# EAGLE board Pico2 W5_V1.0_20240830(1) (EAGLE 9.6.2)
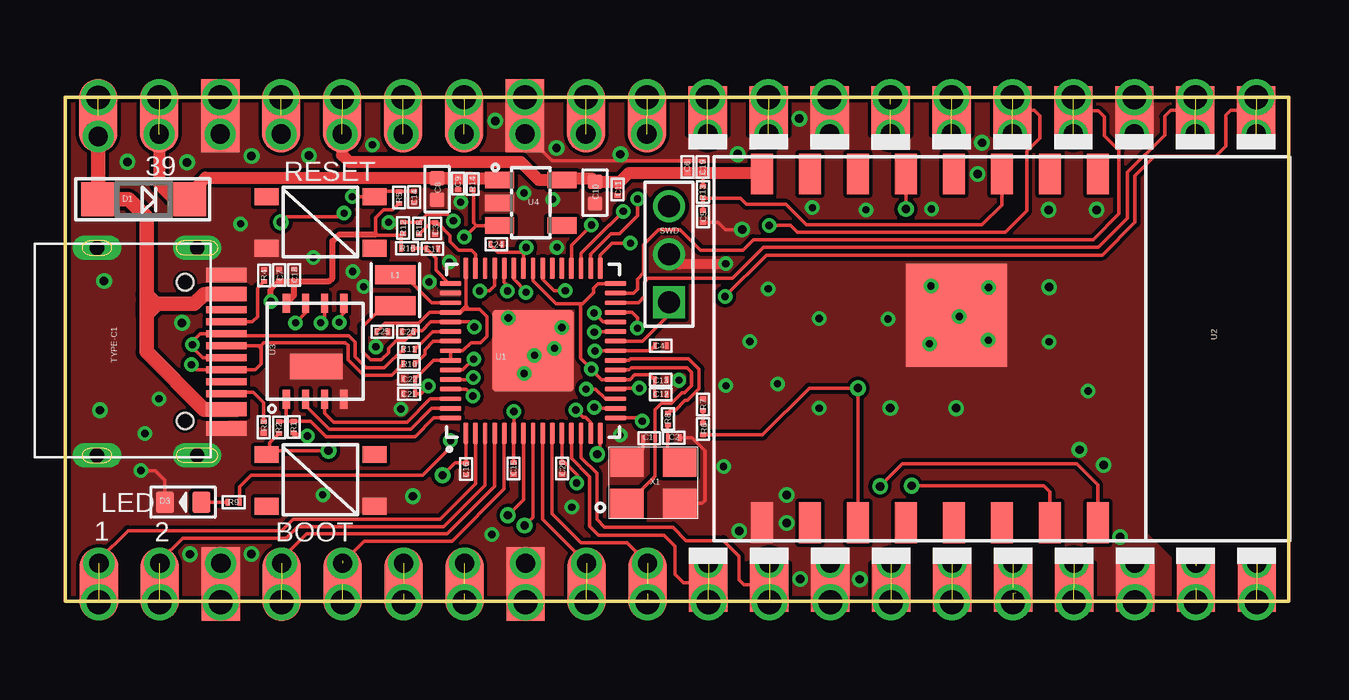
[diagram p0: board, top side]
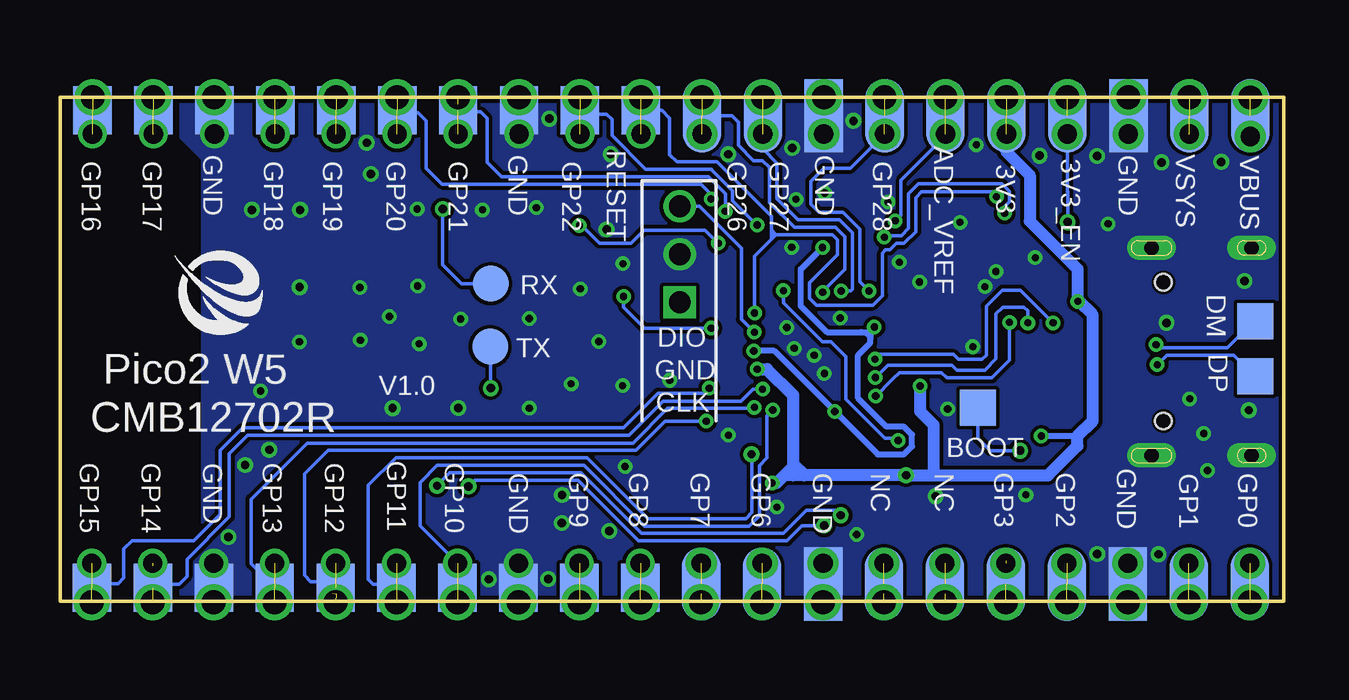
[diagram p1: board, bottom side, seen from below]

Size 51 x 21 mm. Coordinates in mm from the lower left corner, seen from the top.
Copper layers (1*16): Top 0.035mm / dielectric 1.5mm / Bottom 0.035mm
Design rules "default1 *": minimum track width 6mil, minimum drill 0.3mm, track to track 6mil, track to pad 4mil, pad to pad 4mil, via to via 6mil, smd to smd 6mil, copper to edge 6mil, drill to drill 4mil, minimum pad ring 6mil, minimum via ring 6mil, stop-mask expansion 4mil, vias tented up to drill 100mil, thermal gap 10mil
Net classes: 0 default: width 0.102 mm, drill 0.254 mm, clearance 0.102 mm; 1 PWR: width 0.254 mm; 2 GND: width 0.203 mm; 3 RS485: width 0.203 mm, clearance 0.203 mm; 4 USB: width 0.152 mm, clearance 0.152 mm; 5 ANT: width 0.889 mm, clearance 0.203 mm; 6 DVI-D0: width 0.203 mm, clearance 0.203 mm to class 0, clearance 0.203 mm
tRestrict: 6 lines
bRestrict: 6 lines

## Footprints (pad centres in the part's own frame; a part is rotated, then mirrored left to right if it is on the bottom)
SMD_KEY4.2*3.*.2.5 = smd 1 x 0.7: P$1 -2.184,0.102; P$2 2.316,0.102; P$3 -2.184,-2.048; P$4 2.316,-2.048
0201_W = smd 0.2 x 0.3: 1 -0.25,0; 2 0.25,0
0402 = smd 0.6 x 0.6: 1 -0.45,0; 2 0.45,0
SOD123 = smd 1.4 x 1.4: A 1.9,0; C -1.9,0
DISCRETE_D0603 = smd 0.762 x 0.889: + -0.762,0; - 0.762,0
SMD,1.6X2MM = smd 0.8 x 1.7: P$1 -0.65,0; P$2 0.65,0
CROWPICO_W_PAD-1P = smd 1.5 x 1.5: P$1 0,0
CROWPICO-W = smd 3.048 x 1.6: 1-1 -10.185,26.289; 2-1 -10.185,23.749; 3-1 -10.185,21.209; 4-1 -10.195,18.669; 5-1 -10.185,16.129; 6-1 -10.185,13.589; 7-1 -10.185,11.049; 8-1 -10.185,8.509; 9-1 -10.185,5.969; 10-1 -10.185,3.429; 31-1 9.322,3.454; 32-1 9.322,5.994; 33-1 9.322,8.534; 34-1 9.322,11.074; 35-1 9.322,13.614; 36-1 9.322,16.154; 37-1 9.322,18.694; 38-1 9.322,21.234; 39-1 9.322,23.774; 40-1 9.322,26.314 | smd 3.048 x 1.6 bottom: 1-2 -10.185,26.289; 2-2 -10.185,23.749; 3-2 -10.185,21.209; 4-2 -10.195,18.669; 5-2 -10.185,16.129; 6-2 -10.185,13.589; 7-2 -10.185,11.049; 8-2 -10.185,8.509; 9-2 -10.185,5.969; 10-2 -10.185,3.429; 31-2 9.322,3.454; 32-2 9.322,5.994; 33-2 9.322,8.534; 34-2 9.322,11.074; 35-2 9.322,13.614; 36-2 9.322,16.154; 37-2 9.322,18.694; 38-2 9.322,21.234; 39-2 9.322,23.774; 40-2 9.322,26.314 | drill 0.8 pad 1.295: 1-3 -9.322,26.289; 2-3 -9.322,23.749; 3-3 -9.322,21.209; 4-3 -9.322,18.669; 5-3 -9.322,16.129; 6-3 -9.322,13.589; 7-3 -9.322,11.049; 8-3 -9.322,8.509; 9-3 -9.322,5.969; 10-3 -9.322,3.429; 31-3 8.56,3.454; 32-3 8.56,5.994; 33-3 8.56,8.534; 34-3 8.56,11.074; 35-3 8.56,13.614; 36-3 8.56,16.154; 37-3 8.56,18.694; 38-3 8.56,21.234; 39-3 8.56,23.774; 40-3 8.458,26.314 | drill 1 pad 1.295: 1-4 -10.947,26.289; 2-4 -10.947,23.749; 3-4 -10.947,21.209; 4-4 -10.947,18.669; 5-4 -10.947,16.129; 6-4 -10.947,13.589; 7-4 -10.947,11.049; 8-4 -10.947,8.509; 9-4 -10.947,5.969; 10-4 -10.947,3.429; 11-4 -10.947,0.889; 12-4 -10.947,-1.651; 13-4 -10.947,-4.191; 14-4 -10.947,-6.731; 15-4 -10.947,-9.271; 16-4 -10.947,-11.811; 17-4 -10.947,-14.351; 18-4 -10.947,-16.891; 19-4 -10.947,-19.431; 20-4 -10.947,-21.971; 21-4 10.084,-21.946; 22-4 10.084,-19.406; 23-4 10.084,-16.866; 24-4 10.084,-14.326; 25-4 10.084,-11.786; 26-4 10.084,-9.246; 27-4 10.084,-6.706; 28-4 10.084,-4.166; 29-4 10.084,-1.626; 31-4 10.084,3.454; 32-4 10.084,5.994; 33-4 10.084,8.534; 34-4 10.084,11.074; 35-4 10.084,13.614; 36-4 10.084,16.154; 37-4 10.084,18.694; 38-4 10.084,21.234; 39-4 10.084,23.774 | smd 2.007 x 1.6: 11-1 -10.338,0.889; 12-1 -10.338,-1.651; 13-1 -10.338,-4.191; 14-1 -10.338,-6.731; 15-1 -10.338,-9.271; 16-1 -10.338,-11.811; 17-1 -10.338,-14.351; 18-1 -10.338,-16.891; 19-1 -10.338,-19.431; 20-1 -10.338,-21.971; 21-1 9.55,-21.946; 22-1 9.55,-19.406; 23-1 9.55,-16.866; 24-1 9.55,-14.326; 25-1 9.55,-11.786; 26-1 9.55,-9.246; 27-1 9.55,-6.706; 28-1 9.55,-4.166; 29-1 9.55,-1.626; 30-1 9.55,0.914 | smd 2.007 x 1.6 bottom: 11-2 -10.338,0.889; 12-2 -10.338,-1.651; 13-2 -10.338,-4.191; 14-2 -10.338,-6.731; 15-2 -10.338,-9.271; 16-2 -10.338,-11.811; 17-2 -10.338,-14.351; 18-2 -10.338,-16.891; 19-2 -10.338,-19.431; 20-2 -10.338,-21.971; 21-2 9.55,-21.946; 22-2 9.55,-19.406; 23-2 9.55,-16.866; 24-2 9.55,-14.326; 25-2 9.55,-11.786; 26-2 9.55,-9.246; 27-2 9.55,-6.706; 28-2 9.55,-4.166; 29-2 9.55,-1.626; 30-2 9.55,0.914 | drill 0.8 pad 0.813: 11-3 -9.322,0.889; 12-3 -9.322,-1.651; 13-3 -9.322,-4.191; 14-3 -9.322,-6.731; 15-3 -9.322,-9.271; 16-3 -9.322,-11.811; 17-3 -9.322,-14.351; 18-3 -9.322,-16.891; 19-3 -9.322,-19.431; 20-3 -9.322,-21.971; 21-3 8.56,-21.946; 22-3 8.56,-19.406; 23-3 8.56,-16.866; 24-3 8.56,-14.326; 25-3 8.56,-11.786; 26-3 8.56,-9.246; 27-3 8.56,-6.706; 28-3 8.56,-4.166; 29-3 8.56,-1.626; 30-3 8.56,0.914 | drill 1 pad 1.499: 30-4 10.084,0.914 | drill 0.991 pad 1.295: 40-4 10.084,26.314
TP2 = smd 1.5 x 1.5: P$1 0,0
HDR2.0-3P = drill 0.9 square: P$1 0,0 | drill 0.9: P$2 2,0; P$3 4,0
TYPE-C16PIN2MD(073) = smd 0.3 x 1.7: A1 -3.35,4.31; A4 -2.55,4.31; A5 -1.25,4.31; A6 -0.25,4.31; A7 0.25,4.31; A8 1.25,4.31; A9 2.55,4.31; A12 3.35,4.31; B1 3.05,4.31; B4 2.25,4.31; B5 1.75,4.31; B6 0.75,4.31; B7 -0.75,4.31; B8 -1.75,4.31; B9 -2.25,4.31; B12 -3.05,4.31 | drill 0.6 pad 1.016 long: P$1 -4.325,3.09; P$2 4.325,3.09; P$3 -4.325,-1.09; P$4 4.325,-1.09 | hole 0.68: -2.89,2.59; 2.89,2.59
QFN-60_7X7MM = smd 0.875 x 0.2: P$1 -3.437,2.8; P$2 -3.437,2.4; P$3 -3.437,2; P$4 -3.437,1.6; P$5 -3.437,1.2; P$6 -3.437,0.8; P$7 -3.437,0.4; P$8 -3.437,0; P$9 -3.437,-0.4; P$10 -3.437,-0.8; P$11 -3.437,-1.2; P$12 -3.437,-1.6; P$13 -3.437,-2; P$14 -3.437,-2.4; P$15 -3.437,-2.8; P$31 3.437,-2.8; P$32 3.437,-2.4; P$33 3.437,-2; P$34 3.437,-1.6; P$35 3.437,-1.2; P$36 3.437,-0.8; P$37 3.437,-0.4; P$38 3.437,0; P$39 3.437,0.4; P$40 3.437,0.8; P$41 3.437,1.2; P$42 3.437,1.6; P$43 3.437,2; P$44 3.437,2.4; P$45 3.437,2.8 | smd 0.2 x 0.875: P$16 -2.8,-3.437; P$17 -2.4,-3.437; P$18 -2,-3.437; P$19 -1.6,-3.437; P$20 -1.2,-3.437; P$21 -0.8,-3.437; P$22 -0.4,-3.437; P$23 0,-3.437; P$24 0.4,-3.437; P$25 0.8,-3.437; P$26 1.2,-3.437; P$27 1.6,-3.437; P$28 2,-3.437; P$29 2.4,-3.437; P$30 2.8,-3.437; P$46 2.8,3.437; P$47 2.4,3.437; P$48 2,3.437; P$49 1.6,3.437; P$50 1.2,3.437; P$51 0.8,3.437; P$52 0.4,3.437; P$53 0,3.437; P$54 -0.4,3.437; P$55 -0.8,3.437; P$56 -1.2,3.437; P$57 -1.6,3.437; P$58 -2,3.437; P$59 -2.4,3.437; P$60 -2.8,3.437 | smd 3.4 x 3.4: P$61 0,0
BW16 = smd 1.7 x 0.9: 1 -6.9,5.84; 2 -6.9,3.84; 3 -6.9,1.84; 4 -6.9,-0.16; 5 -6.9,-2.16; 6 -6.9,-4.16; 7 -6.9,-6.16; 8 -6.9,-8.16; 9 7.626,-8.16; 10 7.626,-6.16; 11 7.626,-4.16; 12 7.626,-2.16; 13 7.626,-0.16; 14 7.626,1.84; 15 7.626,3.84; 16 7.626,5.84 | smd 4.3 x 4.2: 17 -1.02,-0.06
W25QXX-XSON-8-EP(4X4) = smd 0.8 x 0.3: 1 -2,1.2; 2 -2,0.4; 3 -2,-0.4; 4 -2,-1.2; 5 2,-1.2; 6 2,-0.4; 7 2,0.4; 8 2,1.2 | smd 1.067 x 2.184: EP -0.646,-0.051
SOT23-5_W = smd 0.69 x 1.2: 1 -0.95,-1.3; 2 0,-1.3; 3 0.95,-1.3; 4 0.95,1.3; 5 -0.95,1.3
A_XBJ_SMD3225 = smd 1.4 x 1.2: 1 -1.1,-0.85; 2 1.1,-0.85; 3 1.1,0.85; 4 -1.1,0.85

## Placement (x,y rotation side)
BOOT  TS3425BA  [SMD_KEY4.2*3.*.2.5]  10.58,6 0 top
C1  15pF  [0201_W]  24.34,6.79 180 top
C2  15pF  [0201_W]  25.36,6.8 180 top
C3  225  [0201_W]  15.43,15.52 270 top
C4  475  [0201_W]  24.83,10.64 0 top
C5  104  [0201_W]  26.59,16.03 90 top
C6  104  [0201_W]  25.95,18.09 270 top
C7  104  [0201_W]  8.92,13.58 90 top
C8  10uf  [0402]  15.5,17.17 90 top
C9  104  [0201_W]  16.38,17.39 90 top
C10  10uf  [0402]  22.08,17.02 90 top
C11  104  [0201_W]  23.03,17.16 90 top
C12  104  [0201_W]  24.83,8.61 0 top
C13  104  [0201_W]  24.83,9.22 0 top
C14  104  [0201_W]  14.55,16.83 90 top
C15  104  [0201_W]  18.68,5.52 270 top
C16  104  [0201_W]  16.71,5.51 270 top
C17  475  [0201_W]  15.31,14.69 0 top
C18  225  [0201_W]  9.54,13.58 90 top
C19  105  [0201_W]  26.58,18.09 270 top
C20  104  [0201_W]  20.71,5.52 270 top
C21  104  [0201_W]  14.34,8.65 180 top
C22  104  [0201_W]  14.34,9.26 180 top
C24  104  [0201_W]  17.98,14.86 0 top
C25  475  [0201_W]  13.23,11.23 0 top
C26  475  [0201_W]  14.29,11.22 180 top
D1  MBR120LSF  [SOD123]  3.28,16.74 180 top
D3  MHT192UGCT绿色  [DISCRETE_D0603]  4.92,4.12 180 top
L1  3.3uH  [SMD,1.6X2MM]  13.77,12.95 90 top
P1  TP  [CROWPICO_W_PAD-1P]  1.19,9.36 270 bottom
P2  TP  [CROWPICO_W_PAD-1P]  1.19,11.67 270 bottom
P3  TP  [CROWPICO_W_PAD-1P]  12.74,8.06 270 bottom
PICO-W  CROWPICO-W  [CROWPICO-W]  27.7,10.9 90 top
R1  10K  [0201_W]  9.53,7.25 270 top
R2  1K  [0201_W]  8.91,7.24 270 top
R3  5.1K  [0201_W]  8.28,7.24 270 top
R4  5.1K  [0201_W]  8.3,13.57 270 top
R5  10K  [0201_W]  13.91,16.82 270 top
R6  0R/NC  [0201_W]  26.6,7.18 270 top
R7  1K  [0201_W]  26.59,8.2 270 top
R8  1K  [0201_W]  25.13,7.59 90 top
R9  680R  [0201_W]  7.03,4.12 0 top
R10  27.4R  [0201_W]  14.33,9.88 0 top
R11  27.4R  [0201_W]  14.33,10.5 0 top
R12  200R  [0201_W]  14.09,15.54 270 top
R13  10K  [0201_W]  26.59,17.04 90 top
R14  100K  [0201_W]  16.99,17.38 90 top
R15  1R  [0201_W]  14.75,15.53 90 top
R16  33R  [0201_W]  14.26,14.7 180 top
RESET  TS3425BA  [SMD_KEY4.2*3.*.2.5]  10.58,16.75 0 top
RX  TP  [TP2]  33.05,13.23 0 bottom
SWD  PIND2.0-3P  [HDR2.0-3P]  25.17,12.45 90 top
TX  TP  [TP2]  33.07,10.6 0 bottom
TYPE-C1  TYPE-C16PIN  [TYPE-C16PIN2MD(073)]  2.42,10.39 270 top
U1  RP2350A  [QFN-60_7X7MM]  19.51,10.43 90 top
U2  BW16(4M)板载天线  [BW16]  37.21,10.89 270 top
U3  W25Q64JVXGIQ  [W25QXX-XSON-8-EP(4X4)]  10.42,10.41 90 top
U4  RT9013_33GB  [SOT23-5_W]  19.41,16.6 270 top
X1  X322512MSB4SI  [A_XBJ_SMD3225]  24.51,4.92 0 top

## Library data of the parts
BOOT PICO-W RESET RX SWD TX TYPE-C1 U2 U3 = CKP
C1-C7 C9 C11-C22 C24-C26 R1-R16 U4 = WGH
C8 C10 = A_xbj
D1 = diode
D3 = Crowtail_SIM1606
L1 = CrowPanel_Advance_HMI
P1-P3 = ESP32- 3.5 TFT Display(RGB)-V2.0
U1 = RP2350
X1 = CrowBot_V1.4

## Nets
3V3_EN: PICO-W.37-1 PICO-W.37-2 PICO-W.37-3 PICO-W.37-4 R14.1 U4.3
+1V1: C4.1 C15.1 C24.1 C26.1 L1.P$1 U1.P$6 U1.P$23 U1.P$39 U1.P$50
+3V3: C6.2 C7.1 C10.2 C11.2 C12.1 C13.1 C16.1 C18.1 C19.2 C20.1 C21.1 C22.1 C25.1 PICO-W.36-1 PICO-W.36-2 PICO-W.36-3 PICO-W.36-4 R1.2 R5.2 R12.2 R13.2 R16.2 U1.P$1 U1.P$11 U1.P$20 U1.P$30 U1.P$38 U1.P$45 U1.P$49 U1.P$53 U1.P$54 U2.8 U3.8 U4.5
ADC_VREF: PICO-W.35-1 PICO-W.35-2 PICO-W.35-3 PICO-W.35-4 R12.1 R15.2
BOOT: BOOT.P$1 P3.P$1 R2.2
GND: BOOT.P$4 C1.2 C2.1 C3.2 C4.2 C5.1 C6.1 C7.2 C8.1 C9.1 C10.1 C11.1 C12.2 C13.2 C14.1 C15.2 C16.2 C17.2 C18.2 C19.1 C20.2 C21.2 C22.2 C24.2 C25.2 C26.2 D3.- PICO-W.3-1 PICO-W.3-2 PICO-W.3-3 PICO-W.3-4 PICO-W.8-1 PICO-W.8-2 PICO-W.8-3 PICO-W.8-4 PICO-W.13-1 PICO-W.13-2 PICO-W.13-3 PICO-W.13-4 PICO-W.18-1 PICO-W.18-2 PICO-W.18-3 PICO-W.18-4 PICO-W.23-1 PICO-W.23-2 PICO-W.23-3 PICO-W.23-4 PICO-W.28-1 PICO-W.28-2 PICO-W.28-3 PICO-W.28-4 PICO-W.33-1 PICO-W.33-2 PICO-W.33-3 PICO-W.33-4 PICO-W.38-1 PICO-W.38-2 PICO-W.38-3 PICO-W.38-4 R3.2 R4.1 R7.1 RESET.P$3 SWD.P$2 TYPE-C1.A1 TYPE-C1.A12 TYPE-C1.B1 TYPE-C1.B12 TYPE-C1.P$1 TYPE-C1.P$2 TYPE-C1.P$3 TYPE-C1.P$4 U1.P$47 U1.P$61 U2.9 U2.17 U3.4 U3.EP U4.2 X1.2 X1.4
GP0/UART0_TX: PICO-W.1-1 PICO-W.1-2 PICO-W.1-3 PICO-W.1-4 U1.P$2
GP1/UART0_RX: PICO-W.2-1 PICO-W.2-2 PICO-W.2-3 PICO-W.2-4 U1.P$3
GP2/I2C1_SDA: PICO-W.4-1 PICO-W.4-2 PICO-W.4-3 PICO-W.4-4 U1.P$4
GP3/I2C1_SCL: PICO-W.5-1 PICO-W.5-2 PICO-W.5-3 PICO-W.5-4 U1.P$5
GP4/UART1_TX: U1.P$7 U2.15
GP5/UART1_RX: U1.P$8 U2.16
GP6/SPI_CLK/SD_CLK: PICO-W.9-1 PICO-W.9-2 PICO-W.9-3 PICO-W.9-4 U1.P$9
GP7/SPI_MOSI/SD_SDI: PICO-W.10-1 PICO-W.10-2 PICO-W.10-3 PICO-W.10-4 U1.P$10
GP16/SPI_MISO/SD_SDO: PICO-W.21-1 PICO-W.21-2 PICO-W.21-3 PICO-W.21-4 U1.P$27
GP17/SD_CS/SPI_CS2: PICO-W.22-1 PICO-W.22-2 PICO-W.22-3 PICO-W.22-4 U1.P$28
GP26*I2C1_SDA: PICO-W.31-1 PICO-W.31-2 PICO-W.31-3 PICO-W.31-4 U1.P$40
GP27*I2C1_SCL: PICO-W.32-1 PICO-W.32-2 PICO-W.32-3 PICO-W.32-4 U1.P$41
GP28-ADC2: PICO-W.34-1 PICO-W.34-2 PICO-W.34-3 PICO-W.34-4 U1.P$42
GP29-ADC3: U1.P$43
GPIO8: PICO-W.11-1 PICO-W.11-2 PICO-W.11-3 PICO-W.11-4 U1.P$12
GPIO9: PICO-W.12-1 PICO-W.12-2 PICO-W.12-3 PICO-W.12-4 U1.P$13
GPIO10: PICO-W.14-1 PICO-W.14-2 PICO-W.14-3 PICO-W.14-4 U1.P$14
GPIO11: PICO-W.15-1 PICO-W.15-2 PICO-W.15-3 PICO-W.15-4 U1.P$15
GPIO12: PICO-W.16-1 PICO-W.16-2 PICO-W.16-3 PICO-W.16-4 U1.P$16
GPIO13: PICO-W.17-1 PICO-W.17-2 PICO-W.17-3 PICO-W.17-4 U1.P$17
GPIO14: PICO-W.19-1 PICO-W.19-2 PICO-W.19-3 PICO-W.19-4 U1.P$18
GPIO15: PICO-W.20-1 PICO-W.20-2 PICO-W.20-3 PICO-W.20-4 U1.P$19
GPIO18: PICO-W.24-1 PICO-W.24-2 PICO-W.24-3 PICO-W.24-4 U1.P$29
GPIO19: PICO-W.25-1 PICO-W.25-2 PICO-W.25-3 PICO-W.25-4 U1.P$31
GPIO20: PICO-W.26-1 PICO-W.26-2 PICO-W.26-3 PICO-W.26-4 U1.P$32
GPIO21: PICO-W.27-1 PICO-W.27-2 PICO-W.27-3 PICO-W.27-4 U1.P$33
GPIO22: PICO-W.29-1 PICO-W.29-2 PICO-W.29-3 PICO-W.29-4 U1.P$34
GPIO23: U1.P$35
GPIO24: U1.P$36
GPIO25_LED: R9.2 U1.P$37
N$2: C2.2 R8.1 X1.3
N$4: C3.1 R15.1 U1.P$44
N$5: R3.1 TYPE-C1.B5
N$6: C17.1 R16.1 U1.P$46
N$7: R6.1 R7.2
N$8: PICO-W.6-1 PICO-W.6-2 PICO-W.6-3 PICO-W.6-4
N$9: PICO-W.7-1 PICO-W.7-2 PICO-W.7-3 PICO-W.7-4
N$12: L1.P$2 U1.P$48
N$14: R4.2 TYPE-C1.A5
N$16: C5.2 R13.1 U2.3
N$35: D3.+ R9.1
QSPI_SCLK: U1.P$56 U3.6
QSPI_SD0: U1.P$57 U3.5
QSPI_SD1: U1.P$59 U3.2
QSPI_SD2: U1.P$58 U3.3
QSPI_SD3: U1.P$55 U3.7
QSPI_SS: R1.1 R2.1 U1.P$60 U3.1
RESET: C14.2 PICO-W.30-1 PICO-W.30-2 PICO-W.30-3 PICO-W.30-4 R5.1 RESET.P$2 U1.P$26
RX-DOWNLOAD: RX.P$1 U2.5
SWCLK: SWD.P$1 U1.P$24
SWDIO: SWD.P$3 U1.P$25
TX-DOWNLOAD: R6.2 TX.P$1 U2.11
TYPE_C_D+: P1.P$1 R10.1 TYPE-C1.A6 TYPE-C1.B6
TYPE_C_D-: P2.P$1 R11.1 TYPE-C1.A7 TYPE-C1.B7
USB_D+ [USB]: R10.2 U1.P$52
USB_D- [USB]: R11.2 U1.P$51
VBUS [PWR]: D1.A PICO-W.40-1 PICO-W.40-2 PICO-W.40-3 PICO-W.40-4 TYPE-C1.A4 TYPE-C1.A9 TYPE-C1.B4 TYPE-C1.B9
VSYS: C8.2 C9.2 D1.C PICO-W.39-1 PICO-W.39-2 PICO-W.39-3 PICO-W.39-4 R14.2 U4.1
XIN: C1.1 U1.P$21 X1.1
XOUT: R8.2 U1.P$22

## Tracks (layer width: path | path; a pad name or v marks a point on that pad's centre or on a via)
3V3_EN  (via drill 0.3, 0.35)  (2 unrouted)
  Top 0.152: R14.1 17.02,17.1 17.02,15.75 17.13,15.65 | 17.8,15.65 U4.3 17.13,15.65 | PICO-W.37-2 PICO-W.37-3 | 17.13,15.65 v16.65,15.16 v16.64,15.16 | v11.63,16.16 11.49,16.02 9.23,16.02 v9,15.79
  Bottom 0.152: PICO-W.37-2 9.01,17.05 9,17.06 v9,15.79 | v16.64,15.16 16.57,15.23 15.94,15.23 15.64,15.53 15.64,16.97 15.23,17.38 11.75,17.38 11.44,17.07 11.44,16.63 11.63,16.44 v11.63,16.16
+1V1  (via drill 0.3)
  Top 0.152: L1.P$1 13.27,12.3 12.4,11.43 12.4,10.39 12.74,10.05 13.17,10.05 13.48,10.36 13.48,10.53 13.79,10.84 14.16,10.84 C26.1 14.58,11.27 14.87,11.27 15.24,11.63 U1.P$50 16.85,11.63 v17.06,11.42 | C4.1 24.37,10.43 U1.P$23 22.1,10.43 v22.09,10.42 | C15.1 18.68,6.97 U1.P$6 v18.71,7.9 | C24.1 17.73,14.82 18.02,14.53 19.03,14.53 v19.22,14.72 v19.22,14.73 19.11,14.62 U1.P$39
  Bottom 0.152: 17.6,11.2 17.51,11.2 17.23,10.92
  Bottom 0.254: v19.22,14.73 20.12,13.83 20.12,12.29 19.03,11.2 17.6,11.2 17.28,11.2 17.23,11.25 | v22.09,10.42 21.23,10.42 v18.71,7.9 16.91,6.11 15.83,6.11 15.48,6.45 15.48,6.93 15.83,7.27 16.55,7.27 17.74,8.46 17.74,10.25 17.23,10.76 17.23,10.91 17.23,10.92 17.23,11.25 | 17.23,11.25 v17.06,11.42
+3V3  (via drill 0.3, 0.35)  (3 unrouted)
  Top 0.152: 26.59,17.83 C19.2 | R13.2 26.59,17.83 | 26.68,17.84 26.67,17.83 26.59,17.83 | 27.24,17.84 29,17.84 U2.8 | C25.1 13.32,11.57 14.73,11.57 15.19,12.03 U1.P$49 | U1.P$20 | C12.1 C13.1 24.38,9.42 23.73,9.42 23.54,9.23 U1.P$20 | 16.08,10.44 U1.P$53 | C18.1 | v15.74,5.24 16.25,5.76 C16.1 U1.P$1 | U1.P$11 C20.1 20.85,5.77 21.37,5.25 21.37,4.97 v21.32,4.92 | U1.P$53 U1.P$54 15.36,10.03 C22.1 C21.1 14.83,8.65 v15.15,8.96 | 14.05,15.24 R12.2 | U1.P$45 16.71,12.3 16.85,12.16 | U1.P$49 16.44,12.03 16.7,12.29 | 16.85,12.16 17.27,12.16 17.59,11.84 17.59,11.04 17.32,10.77 16.92,10.77 16.58,10.43 U1.P$53 | U1.P$49 16.5,12.03 16.63,12.16 16.85,12.16 | U1.P$38 19.51,13.35 20.47,12.39 21.49,12.39 | U1.P$30 22.22,13.23 22.03,13.04 22.03,12.84 21.57,12.39 21.49,12.39 | U1.P$20 22.37,9.23 v21.94,9.66 21.49,10.11 21.49,12.39 | R12.2 14.08,15.29 | R12.2 14.01,15.2 R16.2 | R12.2 14.06,15.25 12.94,15.25 12.94,15.28 12.94,15.98 13.27,16.31 13.65,16.31 R5.2
  Top 0.254: 26.59,17.75 26.68,17.84 | v8.58,12.49 8.58,12.98 C7.1 C18.1 | U3.8 9.54,12.74 C18.1 11.01,13.33 11.15,13.46 11.15,15 11.43,15.28 12.94,15.28 | R1.2 9.65,6.88 v10.1,6.88
  Top 0.508: 29.05,17.86 29.03,17.84 27.24,17.84 26.68,17.84 C6.2 23.51,17.84 23.07,17.41 | PICO-W.36-1 11.55,18.59 11.84,18.3 18.99,18.3 19.74,17.55 U4.5 | 20.81,17.45 U4.5 | U4.5 20.77,17.6 21.95,17.6 C10.2 23.01,17.47 23.07,17.41 | C11.2 23.07,17.41
  Bottom 0.254: v10.1,6.88 8.6,6.88 8.59,6.87 | 14.03,5.29 14.08,5.24
  Bottom 0.508: 19.98,5.24 v15.74,5.24 14.59,5.24 | 20.45,5.59 20.45,5.24 | 19.98,5.24 20.45,5.71 | 20.45,5.71 20.45,5.59 | 20.45,5.59 20.8,5.24 | 19.98,5.24 20.8,5.24 | 20.8,5.24 21.12,4.92 v21.32,4.92 | v21.94,9.66 21.52,9.66 20.45,8.59 20.45,5.71 | 14.59,5.24 14.08,5.24 9.82,5.24 8.59,6.47 8.59,6.87 7.96,7.5 7.96,11.92 8.53,12.49 v8.58,12.49 8.58,13.83 10.58,15.83 10.58,17.75 11.55,18.72 PICO-W.36-3 | v15.15,8.96 15.15,7.9 14.59,7.34 14.59,5.24
ADC_VREF  (via drill 0.3)  (3 unrouted)
  Top 0.152: R12.1 14.73,15.79 R15.2 15.08,16.11 15.92,16.11 v16.19,15.84
  Bottom 0.152: v16.19,15.84 15.95,16.08 15.95,17.53 14.09,19.39 PICO-W.35-3
BOOT  (via drill 0.35)
  Top 0.152: R2.2 8.52,6.6 8.52,6.33 8.57,6.28 | 8.57,6.28 BOOT.P$1 | v10.98,6.27 8.59,6.27 8.57,6.28
  Bottom 0.152: P3.P$1 12.74,6.78 12.23,6.27 v10.98,6.27
GND  (via drill 0.3, 0.3 pad 0.6, 0.35)
  Top 0.152: C2.1 26.14,6.8 26.67,6.27 26.67,4.18 26.56,4.07 X1.2 | C19.1 C6.1 20.29,18.34 PICO-W.33-3 | 27.12,14.03 27.54,14.03 | C5.1 27.22,15.78 27.52,15.48 v28.22,15.48 | PICO-W.28-1 PICO-W.28-3 | C1.2 24.09,6.34 23.53,5.77 X1.4 | v3.16,5.44 3.75,5.44 4.16,5.04 D3.-
  Top 0.406: SWD.P$2 25.19,14.45 25.61,14.03 27.12,14.03 27.51,14.03 v27.53,14.06
  other vias: 27.44,5.61 14.5,4.37 20.32,16.74 19.13,17.01 31.15,16.39 33.39,16.3 36.11,16.33 29.31,13.01 28.54,10.81 27.55,8.97 3.33,6.98 3.91,8.43 31.43,8.04 30.07,4.42 43.28,5.67 37.14,8.04 40.99,16.3 4.88,11.59 30.61,20.1 38.22,19.1 20.48,18.87 17.93,20.01 5.09,18.28 7.77,18.55 10.16,18.56 2.6,18.3 5.21,1.95 7.76,1.96 30.65,0.92 33.13,0.91 29.69,9.05 43,16.3 34.4,8.04 38.04,17.79 43.98,2.67 1.63,13.34 1.45,7.95 36.09,13.13 38.5,13.07 36.03,10.72 37.27,11.85 34.3,11.76 31.43,11.77 17.79,2.77 23.15,18.62 41.01,13.08 38.48,10.87 41.02,10.8 42.64,8.75 28.04,18.62 30.08,3.26 10.74,4.43 42.28,6.31 28.1,2.92 25.59,9.2 16.49,16.62 12.95,10.6 16.02,14.12 11.99,13.73 14,8 21.12,3.91 7.32,15.72 10.35,14.31 23.14,6.91 20.71,11.4 20.4,10.53 19.57,10.24 19.14,9.48 20.5,14.74 12.81,19.01 15.18,13.29 12.45,13.1 13.49,15.78 18.48,11.79
  pour Bottom (no thermals): 0.05,21.01 45.95,21.01 45.95,19.31 45.05,18.41 45.05,2.81 45.95,1.91 45.95,0.01 0.05,0.01
  pour Top (no thermals): 0.05,21.01 46.05,21.01 46.05,19.51 45.05,18.51 45.05,2.81 46.05,1.81 46.05,0.01 0.05,0.01
GP0/UART0_TX  (3 unrouted)
  Top 0.152: 9.7,3.41 15.63,3.41 17.11,4.89 U1.P$2 | PICO-W.1-1 1.41,1.73 2.62,2.94 9.02,2.94 9.5,3.41 9.7,3.41 | 9.7,3.41
GP1/UART0_RX  (3 unrouted)
  Top 0.152: PICO-W.2-2 3.95,1.67 4.9,2.62 9.21,2.62 9.7,3.11 15.78,3.11 17.51,4.83 U1.P$3
GP2/I2C1_SDA  (3 unrouted)
  Top 0.152: PICO-W.4-1 9.03,1.76 10.08,2.8 15.93,2.8 17.91,4.78 U1.P$4
GP3/I2C1_SCL  (3 unrouted)
  Top 0.152: 11.57,1.69 PICO-W.5-2 11.57,1.61 12.46,2.5 16.13,2.5 18.31,4.67 U1.P$5
GP4/UART1_TX  (via drill 0.35)
  Top 0.152: U2.15 41.05,4.55 40.79,4.8 v35.28,4.8 | U1.P$7 19.11,4.23 v18.46,3.58
  Bottom 0.152: v18.46,3.58 18.66,3.78 19.88,3.78 20.84,2.82 26.75,2.82 29.28,5.35 34.77,5.35 35.28,4.83 v35.28,4.8
GP5/UART1_RX  (via drill 0.35)
  Top 0.152: U2.16 43.05,4.84 42.17,5.72 34.91,5.72 v33.97,4.78 | U1.P$8 19.51,5.52 19.5,5.51 19.5,3.49 v19.15,3.15
  Bottom 0.152: v19.15,3.15 v19.15,3.14 20.06,3.14 20.7,2.51 26.88,2.51 29.41,5.04 33.72,5.04 v33.97,4.78
GP6/SPI_CLK/SD_CLK  (3 unrouted)
  Top 0.152: U1.P$9 19.91,3.4 PICO-W.9-3
GP7/SPI_MOSI/SD_SDI  (3 unrouted)
  Top 0.152: PICO-W.10-3 23.43,2.43 21.51,2.43 20.31,3.63 U1.P$10 | PICO-W.10-3 24.47,1.39 24.27,1.2 PICO-W.10-1 | PICO-W.10-1 24.27,0.3 | PICO-W.10-1 PICO-W.10-3
GP16/SPI_MISO/SD_SDO  (via drill 0.3)  (3 unrouted)
  Top 0.152: PICO-W.21-2 48.59,20.45 48.39,20.25 48.39,18.96 47.96,18.53 45.4,18.53 44.6,17.73 44.6,15.78 43.23,14.42 29.24,14.42 v27.51,12.69 | U1.P$27 23.64,12.03 23.86,11.81 v23.86,11.37
  Bottom 0.152: v23.86,11.37 26.64,11.37 27.51,12.24 v27.51,12.69
GP17/SD_CS/SPI_CS2  (3 unrouted)
  Top 0.152: PICO-W.22-1 46.09,20.45 45.84,20.2 45.84,19.42 44.28,17.86 44.28,15.96 43.06,14.74 29.12,14.74 27.82,13.44 24.31,13.44 24.16,13.29 24.16,12.69 23.9,12.43 U1.P$28
GP26*I2C1_SDA  (via drill 0.3)  (3 unrouted)
  Top 0.152: U1.P$40 18.71,13.4 19.21,12.9 v19.21,12.87
  Bottom 0.152: 24.1,19.46 PICO-W.31-3 24.29,19.42 24.03,19.42 | PICO-W.31-2 23,20.22 22.73,19.95 22.73,19 22.08,18.36 21.71,18.36 21.42,18.07 21.42,16.61 20.4,15.58 18.67,15.58 18.28,15.19 18.28,13.83 19.21,12.9 v19.21,12.87
GP27*I2C1_SCL  (via drill 0.3)  (3 unrouted)
  Top 0.152: v18.44,12.92 18.44,13.16 18.31,13.29 U1.P$41
  Bottom 0.152: PICO-W.32-2 21.71,18.85 21.11,18.25 21.11,16.76 20.24,15.89 18.52,15.89 17.97,15.34 17.97,12.99 18.04,12.92 v18.44,12.92
GP28-ADC2  (via drill 0.3)  (3 unrouted)
  Top 0.152: U1.P$42 17.91,13.14 17.69,12.92 v17.28,12.92
  Bottom 0.152: 16.63,19.88 PICO-W.34-1 | v17.28,12.92 17.66,13.31 17.66,15.49 18.36,16.2 19.36,16.2 19.7,16.54 19.7,17.5 19.17,18.03 18.05,18.03 PICO-W.34-3
GPIO8  (3 unrouted)
  Top 0.152: PICO-W.11-2 26.6,0.77 25.77,0.77 25.43,1.11 25.43,2.28 24.97,2.74 22.24,2.74 21.86,3.11 21.86,5.19 21.11,5.94 U1.P$12
GPIO9  (3 unrouted)
  Top 0.152: PICO-W.12-2 29.35,0.33 29.3,0.38 29.3,0.57 29.18,0.69 28.3,0.69 28.1,0.9 28.1,1.87 27.44,2.52 25.89,2.52 25.33,3.08 22.49,3.08 22.16,3.4 22.16,5.32 21.51,5.98 U1.P$13
GPIO10  (via drill 0.3)  (3 unrouted)
  Top 0.152: U1.P$14 21.91,7.45 21.7,7.66 21.59,7.66 v21.29,7.96
  Bottom 0.152: PICO-W.14-3 36,3.14 36,4.93 35.28,5.65 29.16,5.65 26.63,3.13 22.29,3.13 21.85,3.57 21.85,5.64 21.53,5.97 21.53,7.72 v21.29,7.96
GPIO11  (via drill 0.35)  (3 unrouted)
  Top 0.152: U1.P$15 22.31,6.25 v22.18,6.12
  Bottom 0.152: PICO-W.15-1 36.97,0.71 37.95,0.71 38.15,0.91 38.15,4.82 37,5.97 29.03,5.97 26.49,3.43 22.42,3.43 22.16,3.69 22.16,6.1 v22.18,6.12
GPIO12  (via drill 0.3)  (4 unrouted)
  Top 0.152: U1.P$16 23.93,7.63 v24.06,7.5
  Bottom 0.152: 39.63,0.33 39.63,0.45 PICO-W.16-1 39.51,0.6 39.73,0.81 40.55,0.81 40.81,1.07 40.81,5.3 39.83,6.28 26.99,6.28 25.78,7.5 v24.06,7.5 | 39.5,0.3 39.45,0.3
GPIO13  (via drill 0.3)  (3 unrouted)
  Top 0.152: v22.06,8.07 22.1,8.03 U1.P$17
  Bottom 0.152: PICO-W.17-2 43.04,1.55 43.04,4.25 40.71,6.58 27.12,6.58 25.68,8.03 22.17,8.03 22.13,8.07 v22.06,8.07
GPIO14  (via drill 0.3)  (3 unrouted)
  Top 0.152: 47.13,1.41 PICO-W.19-2 47.13,1.47 | U1.P$18 22.52,8.43 22.12,8.83 v21.72,8.83
  Bottom 0.152: PICO-W.19-2 47.24,0.67 47.24,0.83 47.12,0.71 46.04,0.71 45.71,1.04 45.71,1.75 43.95,3.51 43.95,6.14 43.18,6.9 27.29,6.9 25.86,8.33 22.61,8.33 22.11,8.83 v21.72,8.83
GPIO15  (via drill 0.3)  (3 unrouted)
  Top 0.152: U1.P$19 22.98,8.87 v23.94,8.87
  Bottom 0.152: PICO-W.20-2 49.67,0.74 49.65,0.72 48.58,0.72 48.34,0.97 48.34,2.17 47.99,2.51 45.42,2.51 44.32,3.62 44.32,6.28 43.38,7.22 27.51,7.22 26.07,8.66 24.15,8.66 v23.94,8.87
GPIO18  (3 unrouted)
  Top 0.152: 42.36,20.42 42.58,20.42 | 42.58,20.42 43.08,20.42 43.32,20.18 43.32,19.39 43.93,18.78 43.93,16.13 42.85,15.06 28.68,15.06 28.25,14.62 26.49,14.62 25.64,15.47 24.73,15.47 24.11,14.85 24.11,13.67 23.85,13.42 23.85,12.99 23.69,12.83 U1.P$29 | PICO-W.24-2 42.55,20.45 42.58,20.42
GPIO19  (via drill 0.3, 0.3 pad 0.6)  (3 unrouted)
  Top 0.152: v29.35,15.65 30.24,15.65 30.52,15.37 39.2,15.37 40.09,16.26 40.09,18.74 40.64,19.29 40.64,20.23 40.41,20.46 PICO-W.25-2 | v23.57,14.91 22.81,14.91 22.31,14.41 U1.P$31
  Bottom 0.152: 23.58,14.91 v23.57,14.91 24.11,15.45 26.67,15.45 27.21,14.91 28.52,14.91 29.26,15.65 v29.35,15.65
GPIO20  (via drill 0.3)  (3 unrouted)
  Top 0.152: v23.86,16.76 v23.87,16.75 23.87,16.06 23.12,15.31 22.77,15.31 21.91,14.45 U1.P$32
  Bottom 0.152: PICO-W.26-1 36.95,20.34 36.06,20.34 35.74,20.01 35.74,18.04 35.07,17.37 24.28,17.37 23.86,16.96 v23.86,16.76
GPIO21  (via drill 0.3)  (3 unrouted)
  Top 0.152: U1.P$33 21.51,14.48 22.68,15.66 22.69,15.66 v23.27,16.24
  Bottom 0.152: v23.27,16.24 23.27,16.98 23.96,17.68 32.59,17.68 33.21,18.29 33.21,20.12 33.47,20.38 34.41,20.38 PICO-W.27-1 34.41,20.7
GPIO22  (via drill 0.3)  (3 unrouted)
  Top 0.152: U1.P$34 21.11,14.83 v21.94,15.67
  Bottom 0.152: PICO-W.29-1 29.33,20.29 28.21,20.29 28,20.08 28,19.4 26.59,17.99 23.84,17.99 23.84,17.98 22.96,17.11 22.96,16.69 v21.94,15.67
GPIO25_LED  (via drill 0.3)
  Top 0.152: R9.2 7.28,4.77 7.75,5.24 14.9,5.24 16.07,6.41 v16.07,6.69 | U1.P$37 19.91,13.41 20.38,12.94 v20.85,12.94
  Bottom 0.152: v20.85,12.94 v20.84,12.93 20.84,12.43 19.21,10.8 18.86,10.8 18.24,10.17 18.24,8.41 16.61,6.78 16.16,6.78 v16.07,6.69
N$2
  Top 0.152: X1.3 25.59,5.77 25.11,6.24 C2.2 25.11,7.33 R8.1
N$4
  Top 0.152: U1.P$44 17.11,14.46 16.95,14.62 16.4,14.62 16.05,14.97 16.05,15.23 15.5,15.78 15.44,15.78 | 15.44,15.78 C3.1 | R15.1 15.25,15.78 15.44,15.78
N$5
  Top 0.152: TYPE-C1.B5 6.79,8.7 7.85,8.7 8.28,8.27 R3.1
N$6
  Top 0.152: R16.1 15.04,14.7 C17.1 15.46,14.29 15.46,13.78 16.01,13.23 U1.P$46
N$7
  Top 0.152: R6.1 26.59,7.44 R7.2
N$8  (3 unrouted)
  Top 0.152: PICO-W.6-2 14.11,0.3
N$9  (3 unrouted)
  Top 0.152: PICO-W.7-2 16.65,0.3
N$12
  Top 0.152: L1.P$2 14.11,13.6 15.28,12.43 U1.P$48
N$14
  Top 0.152: TYPE-C1.A5 7.81,11.64 8.02,11.85 8.02,13.04 R4.2
N$16
  Top 0.152: C5.2 R13.1 28.14,16.79 28.4,16.53 30.06,16.53 30.91,15.68 38.22,15.68 39.05,16.5 U2.3
N$35
  Top 0.152: D3.+ R9.1
QSPI_SCLK  (via drill 0.3)
  Top 0.152: U3.6 10.82,11.86 10.66,11.69 v10.66,11.59 | v17.02,9.31 16.93,9.23 U1.P$56
  Bottom 0.152: v10.66,11.59 10.66,12.09 10.82,12.25 11.71,12.25 11.98,11.98 11.98,10.1 12.46,9.62 13.61,9.62 13.82,9.83 16.5,9.83 v17.02,9.31
QSPI_SD0  (via drill 0.3)
  Top 0.152: U1.P$57 16.71,8.83 v17,8.54 | v11.43,11.61 11.43,11.81 11.62,12.01 U3.5
  Bottom 0.152: v17,8.54 16.32,9.22 16.25,9.29 16.02,9.52 14.26,9.52 14.04,9.3 12.16,9.3 12.14,9.32 11.43,10.03 v11.43,11.61
QSPI_SD1
  Top 0.152: U1.P$59 15.28,8.03 14.4,7.16 11,7.16 10.02,8.14 U3.2
QSPI_SD2
  Top 0.152: U3.3 10.82,7.84 11.2,7.46 14.25,7.46 15.22,8.43 U1.P$58
QSPI_SD3  (via drill 0.3)
  Top 0.152: U1.P$55 16.58,9.63 v17.03,10.08 | v9.61,11.59 10.02,12 U3.7
  Bottom 0.152: v9.61,11.59 10.98,12.96 11.72,12.96 12.39,12.29 12.39,10.25 12.57,10.07 13.55,10.07 13.77,10.28 16.83,10.28 v17.03,10.08
QSPI_SS
  Top 0.152: R2.1 9.22,7.5 | 9.22,7.5 R1.1 10.23,7.5 10.88,6.85 14.59,6.85 15.37,7.63 U1.P$60 | U3.1 9.22,7.5
RESET  (via drill 0.3)  (3 unrouted)
  Top 0.152: U1.P$26 22.42,11.63 v22.05,12.01 | RESET.P$2 v11.97,16.85 | RESET.P$2 13.12,17.08 | RESET.P$2 13.11,17.07 R5.1 C14.2
  Bottom 0.152: PICO-W.30-1 25.91,20.45 25.59,20.13 25.59,18.6 25.28,18.3 23.62,18.3 21.35,16.03 21.35,15.47 | 11.97,16.84 v11.97,16.85 12.17,17.05 15.09,17.05 15.33,16.81 15.33,15.39 15.82,14.9 16.15,14.9 16.42,14.63 16.59,14.63 16.72,14.5 16.72,12.73 17.11,12.34 19.47,12.34 19.76,12.62 19.76,13.26 18.6,14.42 18.6,15.06 18.81,15.27 21.15,15.27 | 21.35,15.07 21.35,15.27 | 21.35,15.27 21.35,15.47 | v22.05,12.01 22.05,14.37 21.35,15.07 | 21.15,15.27 21.35,15.27 | 21.35,15.47 21.15,15.27 | 21.15,15.27 21.35,15.07
RX-DOWNLOAD  (via drill 0.35)
  Top 0.152: v35.05,16.33 U2.5
  Bottom 0.152: RX.P$1 34.27,13.23 35.05,14.01 v35.05,16.33
SWCLK
  Top 0.152: U1.P$24 24.07,10.83 25.17,11.94 SWD.P$1
SWDIO  (via drill 0.3)
  Top 0.152: U1.P$25 22.09,11.23 v22.06,11.2
  Bottom 0.152: SWD.P$3 24.34,16.45 22.6,14.71 22.6,11.74 v22.06,11.2
TX-DOWNLOAD  (via drill 0.35)
  Top 0.152: R6.2 29.08,6.93 31.02,8.87 v33.05,8.87 U2.11
  Bottom 0.152: v33.05,8.87 33.05,10.58 TX.P$1
TYPE_C_D+  (via drill 0.3)
  Top 0.152: v5.27,9.85 5.48,9.64 TYPE-C1.B6 7.92,9.64 8.16,9.88 8.16,10.52 | 8.16,10.52 8.16,10.64 | 8.16,10.64 | TYPE-C1.A6 8.05,10.64 | 8.05,10.64 8.16,10.64 | 8.16,10.64 | 8.05,10.64 8.16,10.52 | 8.16,10.64 | 8.16,10.64 8.28,10.76 11.68,10.76 11.79,10.65 11.79,10.06 12.44,9.41 13.62,9.41 R10.1
  Bottom 0.152: P1.P$1 2.07,10.24 4.88,10.24 v5.27,9.85
TYPE_C_D-  (via drill 0.3)
  Top 0.152: 5.3,10.68 5.3,10.81 5.63,11.14 TYPE-C1.B7 6.81,11.06 11.82,11.06 12.09,10.79 12.09,10.19 12.56,9.72 13.31,9.72 R11.1 | TYPE-C1.A7 5.74,10.14 5.3,10.58 5.3,10.68 | v5.31,10.69 5.3,10.68
  Bottom 0.152: P2.P$1 1.23,11.67 2.35,10.55 5.17,10.55 v5.31,10.69
USB_D+
  Top 0.152: U1.P$52 15.35,10.83 15,10.48 15,10.28 14.63,9.91 14.58,9.91
  Top 0.203: 14.58,9.91 R10.2
USB_D-
  Top 0.152: U1.P$51 15.32,11.23 R11.2
VBUS  (2 unrouted)
  Top 0.254: 1.39,19.39 PICO-W.40-3 | TYPE-C1.B4 6.78,8.09 6.78,7.98 | TYPE-C1.A9 6.87,7.98 7.16,7.98 | 6.71,12.79 6.73,12.81 7.02,12.81 7.05,12.84 6.83,12.84 TYPE-C1.A4 TYPE-C1.B9
  Top 0.61: 1.39,19.39 1.38,19.38 D1.A 2.65,16.74 3.4,15.99 3.4,12.77 | 3.4,11.94 3.4,10.38 5.8,7.98 6.78,7.98 7.16,7.98 | 3.4,11.94 3.4,12.36 | 3.4,12.36 3.42,12.38 3.79,12.38 | 3.79,12.38 5.38,12.38 5.79,12.79 6.71,12.79 | 3.4,12.77 3.4,12.36 | 3.79,12.38 3.4,12.77 | 3.79,12.38 3.79,12.33 3.4,11.94
  Top 0.813: PICO-W.40-2 1.39,19.39
VSYS  (3 unrouted)
  Top 0.152: U4.1 18.17,17.55 | 18.13,17.59 18.36,17.59 | C9.2 17.01,17.64 17.03,17.63
  Top 0.508: 5.07,16.85 5.86,17.64 C9.2 | 18.1,17.56 U4.1 | PICO-W.39-1 3.93,17.34 4.44,16.83 5.09,16.83 | 18.24,17.46 18.36,17.59 | U4.1 18.14,17.58 17.97,17.58 17.93,17.63 | 15.55,17.58 C8.2 18,17.62 18.02,17.64 U4.1 | 18.17,17.55 18.13,17.59 18.09,17.63 17.03,17.63 16.37,17.63 C9.2 | R14.2 C9.2
  Top 0.61: D1.C 5.09,16.83 5.07,16.85
XIN
  Top 0.152: X1.1 23.47,4.07 24.59,5.2 C1.1 24.59,7.98 24.86,8.24 25.29,8.24 25.72,8.67 25.82,8.67 26.12,8.97 26.12,9.53 25.92,9.73 23.61,9.73 23.51,9.63 U1.P$21
XOUT
  Top 0.152: R8.2 25.22,7.94 25.41,7.94 25.84,8.37 25.94,8.37 26.42,8.85 26.42,9.66 25.99,10.09 23.56,10.09 23.5,10.03 U1.P$22

## Text on the board
bPlace: 3V3 | VBUS | VSYS | GND | GP28 | GND | GP27 | GP26 | GP22 | GND | GP21 | GP20 | GP19 | GP18 | GND | GP17 | GP16 | 3V3_EN | RESET | ADC_VREF | DM | DIO | Pico2 W5 | GND | V1.0 | DP | CMB12702R | CLK | BOOT | NC | NC | GND | GP0 | GP1 | GND | GP2 | GP3 | GND | GP6 | GP7 | GP8 | GP9 | GND | GP10 | GP11 | GP12 | GP13 | GP14 | GP15
tNames: LED